# Altium PCB CAN Logger 3d HP3561 PCB.PcbDoc (part 2 of 3)
Units mil, origin at the board's own origin, x right, y up, seen from the top; angles counter-clockwise.
Board outline 2229 x 3254 mil, 4 copper layers (Component Side, Signal Layer 2, Signal Layer 1, Solder Side), stack 33.234 mil thick; 117 components, 131 nets, 581 pads, 372 vias.
Unrouted connection lines stored in the file: 2.
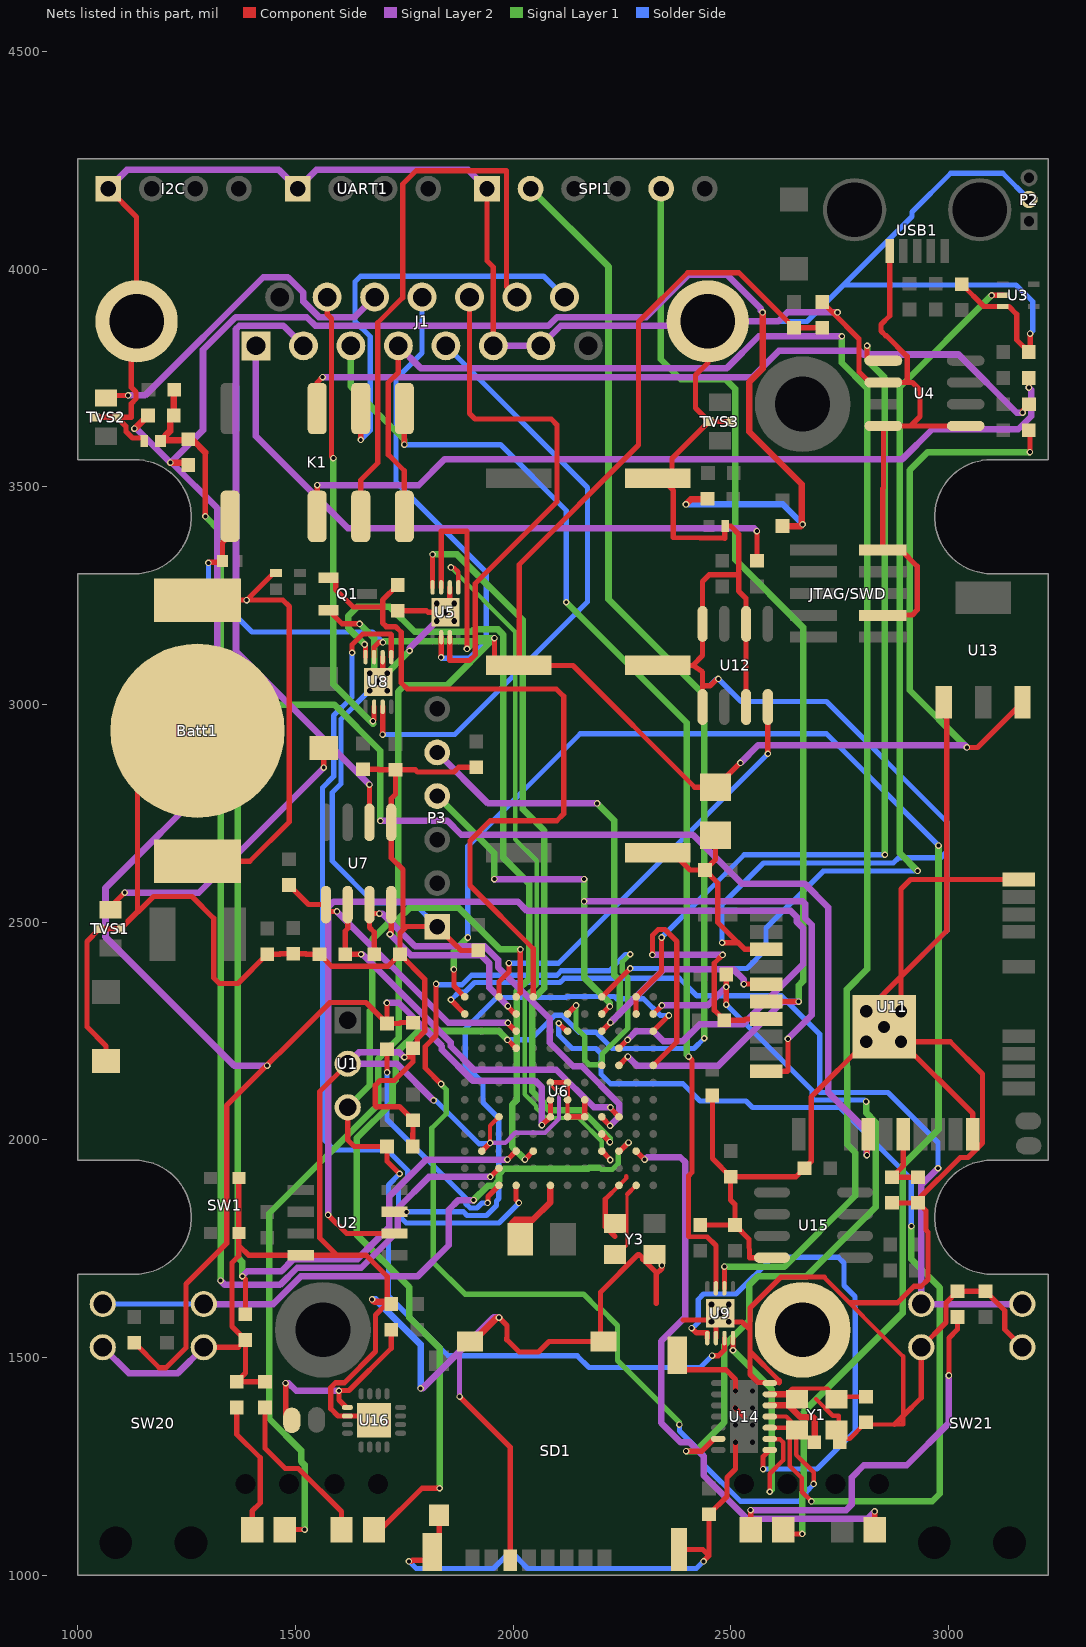
[diagram p4: the nets of this part, all layers, seen from the top]

## Via types
v1: diameter 15, hole 9, Component Side to Solder Side, 290 vias
v2: diameter 20, hole 10, Component Side to Solder Side, 66 vias
v3: diameter 20, hole 13, Component Side to Solder Side, 12 vias
v4: diameter 50, hole 28, Component Side to Solder Side, 4 vias

## Nets (pads, with @x,y where several pads share a name; then routed paths per layer and width w, separated by ;. In a path a pad name is that pad's centre, name@x,y a point inside that pad or via, vN(x,y) a via of type N, cw(c..) or ccw(c..) an arc to the next point about the centre after c; other vN are vias at no path point) (continued)
5V0: C2.1 C4.1 C6.2 C12.2 D11.2 K1.7 L6.2 R4.1 U1.3 U5.3 U8.3 U9.3 U13.3 | length 8118.3
  Component Side w12: v1(1300.18,3325.37) 1301.8,3326.99 1329.59,3326.99 D11.2@1332.6,3330 1332.6,3372 1350,3389.4 K1.7@1350,3432.36 ; U1.3@1620,2075 1620,2000 1635,1985 C4.1@1710.47,1985 1710.47,1951.24 v1(1739.36,1922.35) ; U8.3@1680.63,3109.17 1680.63,3131.63 1692,3143 v1(1701,3143) ; U5.3@1834.69,3269.17 1834.69,3398.27 1894,3398.27 v1(1894,3128) ; v1(1957,3152.5) 1957,3103 1970,3090 C2.1@2013.15,3090 C2.1@2014,3090 ; v1(2457,1504.5) 2471.82,1504.5 2485.32,1518 U9.3@2485.32,1545 ; v1(2521.92,2866) 2520.76,2866 C12.2@2465,2810.24 2417,2810.24 2137.24,3090 C2.1@2014,3090 ; C6.2@2710,3865.47 L6.2@2645,3865.47 2518.47,3992 2401,3992 2288,3879 2288,3596 2014,3322 C2.1@2014,3090 ; v1(3042.32,2901.5) 3066.5,2901.5 U13.3@3170,3005 ; R4.1@3184.53,3630 3187,3627.53 v1(3187,3580)
  Signal Layer 2 w15: v1(2521.92,2866) 2562.92,2907 3036.82,2907 v1(3042.32,2901.5)
  Signal Layer 1 w15: U1.3@1620,2075 1670.47,2125.47 1670.47,2296.2 1676,2301.73 1676,2460.28 1717.19,2501.47 1717.19,2540.19 1736,2559 1736,3030 1750,3044 1848,3044 1956.5,3152.5 v1(1957,3152.5) ; v1(1701,3143) 1703.77,3145.77 1950.27,3145.77 v1(1957,3152.5) ; v1(1894,3128) 1918.5,3152.5 v1(1957,3152.5) ; v1(3042.32,2901.5) 2911,3032.82 2911,3538.5 2952.5,3580 v1(3187,3580)
  Solder Side w12: v1(1300.18,3325.37) 1300.18,3266.8 1400.01,3166.97 1677.03,3166.97 v1(1701,3143) ; v1(1739.36,1922.35) 1713.5,1896.49 1713.5,1641.89 1850.89,1504.5 2147.02,1504.5 2174.14,1477.38 2429.88,1477.38 v1(2457,1504.5)
A6: J1.1 R18.1 | length 1517
  Component Side w12: R18.1@2560,3330.03 v1(2560,3398.27)
  Signal Layer 2 w15: J1.1@1409.21,3824.09 1409.21,3616.5 1620.72,3405 2553.27,3405 v1(2560,3398.27)
A6_Sense: U6.A3 U12.8 | length 988.2
  Component Side w12: U6.A3@1967.52,2328.7 1967.52,2363.52 1990.28,2386.28 v1(1990.28,2406) ; v1(2585,2887) U12.8@2585,2994.53
  Solder Side w12: v1(1990.28,2406) 2104,2406 v1(2585,2887)
A7: J1.11 TVS2.1 | length 798.2
  Component Side w12: TVS2.1@1065,3710 v1(1115.5,3710)
  Signal Layer 2 w15: v1(1115.5,3710) 1154.34,3710 1426.01,3981.67 1482.7,3981.67 1518.27,3946.1 1518.27,3925.71 1553.84,3890.14 1636.08,3890.14 J1.11@1681.85,3935.91
A7_Measured: C17.2 D9.2 R15.2 R24.1 U6.L3 | length 2959.6
  Component Side w12: R24.1@1220.45,3655 R24.1@1220.45,3663.93 ; v1(1293,3432.36) 1293,3579 ; v1(1947.52,1915) U6.L3@1967.52,1935
  Component Side w15: R24.1@1220.38,3664 1212.13,3655.75 1212.13,3628.07 1190.04,3605.98 D9.2@1190.04,3605 1192.31,3607.26 1251.24,3607.26 C17.2@1253.5,3609.53 1255.03,3608 1264,3608 1293,3579 ; R24.1@1220.45,3663.93 1220.95,3664.43 1220.95,3722.43 R15.2@1221.53,3723
  Signal Layer 2 w15: v1(1328,1677) 1338,1667 1464.47,1667 1503.97,1706.5 1651.07,1706.5 1735,1790.43 1735,1843.28 1806.72,1915 v1(1947.52,1915)
  Signal Layer 1 w15: v1(1293,3432.36) 1328,3397.36 v1(1328,1677)
AGND: C17.1 C21.1 C23.2 C24.1 L5.2 R24.2 R28.2 U6.G6 U6.H6 | length 6526.1
  Component Side w12: C21.1@1130,1534.47 1130,1534.29 1187.34,1476.96 1202.66,1476.96 1248.5,1522.79 1248.5,1669 1342,1762.5 1342,2079 1579,2316 1661.79,2316 C23.2@1710.24,2267.56 ; v1(1710,2315) 1710.24,2314.76 C23.2@1710.24,2267.56 ; L5.2@1770,2269.53 1741.21,2269.53 1739,2267.32 C23.2@1710.47,2267.32 C23.2@1710.24,2267.56 ; v1(2066,2034) 2066.52,2034 U6.H6@2085.63,2053.11 U6.G6@2085.63,2092.48
  Component Side w15: v1(1130,3634) 1131.32,3634 R24.2@1161.32,3664 ; v1(1212.9,3555.57) 1248.4,3555.57 C17.1@1253.5,3550.47 ; v1(2397,3460) 2408.15,3471.15 2445.02,3471.15 R28.2@2446.4,3472.53 ; v1(2573,3901) 2573,3771.24 2542.5,3740.74 2542.5,3626.5 2663,3506 v1@2663,3412 ; C24.1@2618.79,3410 2661,3410 v1@2663,3412 ; v1(2665,3414) v1@2663,3412
  Signal Layer 2 w15: v1(1130,3634) 1134.47,3634 v1(1212.9,3555.57) ; v1(1435,2170.87) 1359.13,2170.87 1063.71,2466.29 1063.71,2578.71 1320.18,2835.18 1320.18,3451.33 1215.94,3555.57 v1(1212.9,3555.57) ; v1(1710,2315) 1737.07,2315 1836.5,2215.57 1836.5,2206.93 1906.93,2136.5 2050,2136.5 2066,2120.5 v1(2066,2034) ; v1(2573,3901) 2569,3905 2569,3909.12 2491.13,3986.99 2402.5,3986.99 2305.65,3890.14 2101.3,3890.14 2081.03,3869.86 1545.83,3869.86 1525.83,3889.86 1362.48,3889.86 1287.69,3815.07 1287.69,3630.36 v1(1212.9,3555.57)
  Solder Side w15: v1(2397,3460) 2619,3460 v1(2665,3414)
AREF: C23.1 U6.M3 | length 539.8
  Component Side w12: v1(1710.47,2155) C23.1@1710.47,2208.27 ; v1(1941.39,1855.5) 1941.96,1856.07 1941.96,1870.07 U6.M3@1967.52,1895.63
  Solder Side w12: v1(1710.47,2155) 1710.47,2047.37 1890.5,1867.34 1890.5,1854.34 1901.34,1843.5 1916.66,1843.5 1928.66,1855.5 v1(1941.39,1855.5)
BTTN1: SW21.1 SW21.3 U6.B1 | length 2038.7
  Component Side w12: v1(1857,2322) 1857,2321.11 U6.B1@1888.78,2289.33
  Signal Layer 2 w15: v1(2975.84,1935) 2937.5,1896.66 SW21.1@2937.5,1623 SW21.3@3169.5,1623
  Solder Side w12: v1(1857,2322) 1857.81,2322 1875.31,2339.5 1889.3,2339.5 1911.25,2361.46 2107.54,2361.46 2117.58,2371.5 2381.5,2371.5 2422,2331 2616.36,2331 2704,2243.36 2704,2110 2705,2109 2861.16,2109 2975.84,1994.32 v1(2975.84,1935)
BTTN2: SW20.1 SW20.3 U6.K10 | length 1461.3
  Component Side w12: U6.K10@2242.3,1971.41 U6.K10@2243.11,1972.22 ; U6.K10@2243.11,1974.37 U6.K10@2243.11,1972.22 ; v1(2265,1994.11) U6.K10@2243.11,1972.22
  Signal Layer 2 w15: SW20.3@1289.5,1623 1448.76,1623 1512.26,1686.5 1780.5,1686.5 1852,1758 1852,1839.68 1874.32,1862 v1(1909,1862)
  Signal Layer 1 w12: 2203.74,1932.39 2227.55,1932.39 2241.5,1946.34 2241.5,1970.61 v1(2265,1994.11)
  Signal Layer 1 w15: v1(1909,1862) 1942,1895 1955.8,1895 1967.52,1906.72 1967.52,1921.8 1979.72,1934 2057.35,1934 2057.72,1933.63 2172.46,1933.63 2174.72,1935.89 2196.96,1935.89
  Solder Side w12: SW20.1@1057.5,1623 SW20.3@1289.5,1623
CAN0H: J1.13 U5.7 | length 1203
  Component Side w12: U5.7@1854.37,3155 1854.37,3102 1855.37,3101 1900,3101 1913,3114 1913,3278 2101,3466 2101,3642.5 2087.5,3656 1912.5,3656 1899.96,3668.54 J1.13@1899.96,3935.91
CAN0L: J1.12 U5.6 | length 1068
  Component Side w12: v1(1834.69,3108.5) U5.6@1834.69,3155
  Solder Side w12: J1.12@1790.91,3935.91 1790.91,3807.91 1731,3748 1731,3511 1938.5,3303.5 1938.5,3146.34 1898.66,3106.5 1836.69,3106.5 v1(1834.69,3108.5)
CAN0RX: U5.4 U6.J9 | length 1720.4
  Component Side w12: U5.4@1815,3269.17 v1(1815,3345) ; U6.J9@2203.74,2013.74 2222,1995.48 v1(2222,1995)
  Signal Layer 1 w15: v1(1815,3345) 1871.25,3345 2022,3194.25 2022,2760 2071.5,2710.5 2071.5,2348.97 2044,2321.47 2044,2111.97 2070,2085.97 2070,2080.43 2082.43,2068 2157.5,2068 2222,2003.5 v1(2222,1995)
CAN0TX: U5.1 U6.K9 | length 1664.7
  Component Side w10: v1(1857,3315) 1864,3315 1874.06,3304.94 U5.1@1874.06,3269.17
  Component Side w12: U6.K9@2203.74,1974.37 2223,1955.11 v1(2223,1954)
  Signal Layer 1 w10: v1(1857,3315) 2004.5,3167.5 2004.5,2690.77 2054,2641.27 2054,2356.22 2026.5,2328.72 2026.5,2104.72 2052.5,2078.72 2052.5,2073.18 2075.18,2050.5 2150.25,2050.5 2203.75,1997 2203.75,1974.36 2223,1955.11 v1(2223,1954)
CAN1H: J1.5 U8.7 | length 1384
  Component Side w12: v1(1700.31,2931) U8.7@1700.31,2995
  Solder Side w12: v1(1700.31,2931) 1866,2931 2171,3236 2171,3498.53 J1.5@1845.43,3824.09
CAN1L: J1.10 U8.6 | length 1064.3
  Component Side w12: J1.10@1572.8,3935.91 1572.8,3897 1583,3886.8 1583,3570 v1(1587,3566) ; v1@1677.78,2961.65 1680.61,2964.48 U8.6@1680.63,2995
  Signal Layer 1 w15: v1(1587,3566) 1587,3047.13 v1@1678,2956.13 ; v1(1678,2962) v1@1678,2956.13 ; v1@1678.37,2955.76 v1@1678,2956.13
CAN1RX: U6.K5 U8.4 | length 1791.7
  Component Side w12: v1(1658.94,3138) 1660.94,3136 U8.4@1660.94,3109.17 ; v1(2027,1955) 2027,1955.11 U6.K5@2046.26,1974.37
  Signal Layer 1 w15: v1(1658.94,3138) 1621,3175.94 1621,3203.09 1642.11,3224.19 1716.81,3224.19 1773.91,3167.09 1904.8,3167.09 1910.22,3172.5 1965.28,3172.5 1977,3160.78 1977,2648.5 2036.5,2589 2036.5,2369.89 2008,2341.39 2008,2091.28 1998,2081.28 1998,1984 v1(2027,1955)
CAN1TX: U6.M4 U8.1 | length 1997.9
  Component Side w12: v1(1630,3119) 1630,3137.5 1654.5,3162 1719,3162 1720,3161 U8.1@1720,3109.17 ; U6.M4@2006.89,1895.63 2006.89,1862.57 2013.15,1856.31 v1(2013.15,1855.5)
  Solder Side w12: v1(1630,3119) 1630,3016.97 1587.75,2974.72 1587.75,2834.85 1562,2809.1 1562,2004 1589,1977 1710.87,1977 1757.86,1930.02 1757.86,1914.69 1736.5,1893.33 1736.5,1827.34 1754.34,1809.5 1967.15,1809.5 v1(2013.15,1855.5)
CAN2H: J1.3 K1.3 U9.7 | length 2755.5
  Component Side w12: v1(1750,3597) K1.3@1750,3680 ; v1(2403,2191.5) 2411.1,2183.4 2411.1,1925.67 2403,1917.57 2403,1778 2446,1777 2465.63,1757.37 U9.7@2465.63,1659.17
  Signal Layer 1 w15: J1.3@1627.32,3824.09 1627.32,3730.68 1750,3608 v1(1750,3597) ; v1(2122,3235) 2399,2958 2399,2195.5 v1(2403,2191.5)
  Solder Side w12: v1(1750,3597) 1971,3597 2122,3446 v1(2122,3235)
CAN2H/J1708+: J1.15 K1.1 | length 965
  Component Side w12: v1(1650,3608) K1.1@1650,3680
  Solder Side w12: v1(1650,3608) 1672,3630 1672,3845 1637,3880 1637,3971 1650,3984 2069.98,3984 J1.15@2118.07,3935.91
CAN2L: J1.4 K1.6 U9.6 | length 3930.1
  Component Side w12: J1.4@1736.38,3824.09 1736.38,3763 1713,3739.62 1713,3574 1750,3537 K1.6@1750,3432.36 ; U9.6@2485.32,1659.17 v1(2485.32,1709)
  Signal Layer 2 w15: J1.4@1736.38,3824.09 1787.47,3773 2491.12,3773 2564.12,3846 v1(2755,3846)
  Signal Layer 1 w15: v1(2485.32,1709) 2623,1709 2786,1872 2786,1971 2767,1990 2767,2167.57 2766.57,2168 2766.57,2345.57 2813,2392 2813,3727.21 2755,3785.21 v1(2755,3846)
CAN2L/J1708-: J1.14 K1.4 | length 1353.7
  Component Side w12: K1.4@1650,3432.36 1650,3516 1689,3555 1689,3877 1746.64,3934.64 1746.64,4195.64 1777,4226 1984,4226 1985,4225 1985,3959.92 J1.14@2009.02,3935.91
CAN2RX: U9.4 U14.2 | length 552
  Component Side w10: v1(2589.37,1192) 2589.37,1233.5 2620,1264.13 2620,1305.63 2612.85,1312.78 2590.09,1312.78 U14.2@2589.37,1313.5
  Component Side w12: v1(2505,1517) U9.4@2505,1545
  Signal Layer 1 w15: v1(2505,1517) 2594.05,1427.94 2594.05,1196.68 v1(2589.37,1192)
CAN2TX: U9.1 U14.1 | length 1200.9
  Component Side w12: v1(2410,1568) 2421,1557 2445.94,1557 U9.1@2445.94,1545 ; v1(2574.05,1244.06) 2574,1244.11 2574,1272.54 U14.1@2589.37,1287.91
  Solder Side w12: v1(2410,1568) 2412.5,1568 2425,1580.5 2425,1633.5 2437.5,1646 2512,1646 2596.5,1730.5 2746.66,1730.5 2760,1717.16 2760,1666 2785.35,1640.65 2785.35,1614.77 2786,1614.12 2786,1332 2698.05,1244.06 v1(2574.05,1244.06)
"CAN 1 Switch": Q1.1 R14.2 U6.A5 | length 1749
  Component Side w12: Q1.1@1575.71,3291.5 1586.53,3291.5 1592.35,3285.69 1592.35,3264.42 1632.77,3224 1700.31,3224 ; R14.2@1735,3274.53 1700.31,3239.84 1700.31,3224 ; U6.A5@2046.26,2328.7 2046.26,2439.32 1901,2584.58 1901,2687 1947,2733 2100,2733 2116,2749 2116,3019 2099,3036 1757,3036 1743,3050 1743,3166 1730,3179 1708.81,3179 1700.31,3187.5 1700.31,3224
CHIP_EN: R17.1 U6.K4 U11.22 | length 4484.5
  Component Side w12: v1(1378,1687) 1385,1680 R17.1@1385,1599.53 ; v1(1987,1955) 1987.52,1955 U6.K4@2006.89,1974.37 ; v1(2812.57,1965) 2812.57,2009.64 U11.22@2815.84,2012.91
  Signal Layer 2 w15: v1(1378,1687) 1389.53,1698.53 1467.72,1698.53 1495.69,1726.5 1642.78,1726.5 1715,1798.72 1715,1869.71 1800.29,1955 v1(1987,1955) ; v1(1695,2733) 1849,2733 1881,2701 2413,2701 2525,2589 2669,2589 2724,2534 2724,2109.1 2812.57,2020.53 v1(2812.57,1965)
  Signal Layer 1 w15: v1(1378,1687) 1378,1720 1368,1730 1368,2981.5 1386.5,3000 1589,3000 1695,2894 v1(1695,2733)
CLKO/SOF: U6.C7 U14.3 | length 2314.8
  Component Side w10: U14.3@2589.37,1339.1 2629.14,1339.1 2635,1333.24 2635,1251.67 2663,1223.67 2663,1192 v1(2685,1170)
  Component Side w12: v1@2104.77,2268 U6.C7@2123.91,2248.87 ; U6.C7@2123.91,2249.41 U6.C7@2123.91,2248.87 ; U6.C7@2125,2249.96 U6.C7@2123.91,2248.87
  Signal Layer 1 w15: v1(2685,1170) 2962.5,1170 2980,1187.5 2980,1661 2914.5,1726.5 v1(2914.5,1802)
  Solder Side w12: v1(2104.72,2268) 2104.72,2241.1 2135.83,2209.99 2190.17,2209.99 2202,2198.16 2202,2151 2224,2129 2390,2129 2429.5,2089.5 2534.5,2089.5 2549.5,2074.5 2750.45,2074.5 2914.5,1910.45 v1(2914.5,1802)
CS1: R33.1 U6.E12 U11.16 | length 850.9
  Component Side w12: v1(2320,2425) 2320,2470.16 2333.34,2483.5 2348.66,2483.5 2376.03,2456.13 2376.03,2225.4 U6.E12@2321.85,2171.22 ; v1(2481,2425) 2462,2406 2462,2298.15 R33.1@2485.15,2275 2531,2275 2533.79,2277.79 U11.16@2581.04,2277.79
  Signal Layer 2 w15: v1(2320,2425) v1(2481,2425)
CS-CAN: R32.1 U6.B12 U14.13 | length 1843.6
  Component Side w12: U6.B12@2321.85,2289.33 v1(2341.52,2309) ; v1(2397.44,1285.25) 2433.45,1285.25 2461.71,1313.5 U14.13@2471.26,1313.5 ; v1(2489.53,2311) v1(2489.53,2351.75) R32.1@2489.53,2380
  Signal Layer 2 w15: v1(2341.52,2309) 2446.77,2309 v1(2489.53,2351.75)
  Signal Layer 1 w15: v1(2397.44,1285.25) 2419.1,1285.25 2485,1351.15 2485,1528 2542,1585 2542,1666.5 2562.5,1687 2674,1687 2832.57,1845.57 2832.57,2040.7 2810.5,2062.77 v1(2810.5,2088.16)
  Solder Side w12: v1(2489.53,2311) 2687,2113.53 2687,2093 2688,2092 2806.66,2092 v1(2810.5,2088.16)
"Debug RX": P3.4 U6.B9 U11.19 | length 1766.7
  Component Side w12: U6.B9@2203.74,2289.33 2221.41,2307 v1(2222.23,2307) ; U11.19@2581.04,2157.79 2630,2157.79 2631,2158.79 v1(2631,2232)
  Signal Layer 2 w15: v1(1957,2599) v1(2163,2599) ; v1(2163,2548) 2665,2548 2671,2542 2671,2509.24 2685.82,2494.42 2685.82,2286.82 v1(2631,2232)
  Signal Layer 1 w15: P3.4@1825.47,2790 1957,2658.47 v1(1957,2599) ; v1(2163,2599) v1(2163,2548) 2163,2373 2222.23,2313.77 v1(2222.23,2307)
"Debug TX": P3.5 U6.C9 U11.14 | length 1405.7
  Component Side w12: U6.C9@2203.74,2249.96 v1(2223.43,2269.65) ; v1(2530,2358) 2580.83,2358 U11.14@2581.04,2357.79
  Signal Layer 2 w15: P3.5@1825.47,2890 1942.47,2773 v1(2193,2773) ; v1(2223.43,2269.65) 2345.53,2391.75 2506.09,2391.75 2530,2367.85 v1(2530,2358)
  Signal Layer 1 w15: v1(2193,2773) 2232.04,2733.96 2232.04,2378.67 2245,2365.71 2245,2291.22 v1(2223.43,2269.65)
EOSC16: U6.M11 Y3.1 | length 172.3
  Component Side w7: Y3.1@2242.3,1740 2261.93,1759.62 2261.93,1875.08 2262,1875.15
  Component Side w10: 2262,1875.15 U6.M11@2282.48,1895.63
EXTAL32: U6.M6 X1.2 | length 223.6
  Component Side w15: X1.2@2016.07,1762.76 2004.33,1762.76 1996.56,1754.98 1996.56,1807.9 2005.34,1816.68 2045.21,1816.68 2085.63,1857.1 U6.M6@2085.63,1895.63
GND: Batt1.2 C1.1 C2.2 C3.2 C4.2 C5.1 C6.1 C7.1 C8.1 C9.1 C10.2 C11.1 C12.1 C13.1 C14.1 C15.1 C16.1 C18.1 C19.1 C20.1 C22.1 C25.1 C28.2 D9.1 D10.1 I2C.1 J1.6 J1.7 J1.16 J1.17 JTAG/SWD.3 JTAG/SWD.9 L5.1 P2.2 P3.1 pad.0@2665,1564 Q1.2 R2.2 R3.2 R7.2 R8.2 R9.2 R11.2 R12.2 R13.2 R14.1 R17.2 R19.2 R23.2 R27.2 SD1.6 SD1.P1 SD1.P2 SD1.P3 SD1.P4 SD1.P5 SD1.SW SPI1.1 SW1.3 SW1.4 SW20.2 SW20.4 SW21.2 SW21.4 TVS1.3 TVS2.3 TVS3.3 U1.2 U2.8 U3.3 U4.2 U4.4 U4.5 U5.0 U5.2 U6.F6 U6.F7 U6.G7 U6.G8 U6.H3 U6.H7 U6.H8 U6.K2 U6.M10 U7.5 U8.0 U8.2 U9.0 U9.2 U11.9 U11.12 U11.28 U11.29 U12.2 U12.4 U12.5 U12.7 U13.1 U14.7 U15.4 U16.2 U16.17 UART1.1 USB1.4 Y1.2 Y1.4 Y3.2 Y3.4 Z1.1 | length 28504
  Component Side w8: U6.F6@2085.63,2131.85 2080.69,2131.85 2100.54,2112 v1(2105.29,2112)
  Component Side w10: v1(1947.01,1993.23) 1947.01,2032.6 U6.H3@1967.52,2053.11 ; U6.H7@2125,2053.11 U6.G7@2125,2092.48 ; 2210.5,1863.02 2211.5,1864.02 U6.M10@2243.11,1895.63 2260.12,1912.64 2260.12,1916.99 ; SD1.P3@2370.65,1490.79 SD1.P3@2370.65,1516.58 ; 2545,1514.29 2545,1613.71 2615.29,1684 2714.71,1684 2895.75,1502.96 2895.75,1366.22 2895.75,1346.33 2875.86,1346.33 2805.51,1346.33 2773.03,1313.85 2748.06,1313.85 2748.06,1366.78 2733.85,1366.78 2695.47,1405.17 ; 2611.1,1441.46 2611.1,1443 ; 2611.1,1446.78 2611.1,1448.19
  Component Side w12: TVS2.3@1040,3660 TVS2.3@1090,3660 ; Z1.1@1065,2181 1065,2216 1021,2260 1021,2456 TVS1.3@1050,2485 TVS1.3@1100,2485 1174,2559 1262.5,2559 1312.5,2509 1312.5,2372.1 1325,2359.6 1368.2,2359.6 C10.2@1435,2426.4 1464,2426.4 1465.15,2427.55 C1.1@1495,2427.55 1524,2427.55 1524.94,2426.61 R9.2@1555.47,2426.61 1583.08,2399 1712.61,2399 R8.2@1740,2426.39 ; I2C.1@1070,4185 1135,4120 J1.16@1135,3880 1123,3868 1123,3728.5 1123.16,3728.5 1134,3717.66 1134,3702.34 1123.16,3691.5 1123,3691.5 1123,3660 TVS2.3@1090,3660 ; 1116,2504 1137,2525 1137,2802 Batt1.2@1275,2940 ; D9.1@1152.64,3605 1152.64,3609.2 1149.78,3612.05 1125.78,3612.05 1110.97,3626.87 1110.97,3639.03 TVS2.3@1090,3660 ; SW20.4@1289.5,1524 1368.53,1524 R17.2@1385,1540.47 ; SW1.4@1369.96,1900 SW1.3@1369.96,1786.65 1369.96,1757.99 ; R3.2@1430,1444.53 R2.2@1365,1444.53 1385,1464.53 R17.2@1385,1540.47 ; Q1.2@1575.71,3216.69 1606.93,3185.47 v1(1647.5,3185.47) ; U1.2@1620,2175 1556,2111 1556,1775 1596,1735 ; C16.1@1655,2851.62 1691,2851.62 1692.15,2850.47 R12.2@1730,2850.47 ; U16.17@1680.47,1356.02 1654.84,1356.02 1645,1365.87 U16.2@1619.45,1365.87 1598,1365.87 1581.34,1382.53 1581.34,1431.66 1592.17,1442.5 1612.62,1442.5 1684,1513.88 1684,1598 C25.1@1711,1625 ; U8.2@1700.31,3109.17 1700.31,3082.24 v3(1710.47,3072.09) ; C25.1@1711,1617.03 C25.1@1711,1625 ; R14.1@1735,3215.47 1801.14,3215.47 1804.52,3212.09 U5.0@1844.53,3212.09 ; v1(1750,2190) 1750.57,2190.57 1766.07,2190.57 1770,2194.5 ; v1(1760.66,1032) 1761.24,1032.57 1766.72,1032.57 1768.95,1034.8 1797.56,1034.8 1814.2,1051.44 SD1.P2@1814.2,1053.7 1830.15,1069.65 SD1.SW@1830.15,1138.35 ; C4.2@1769.53,1985 1769.53,2015 1770,2015.47 C20.1@1770,2045.47 1739,2076.47 1685,2076.47 1683.53,2077.95 1683.53,2125.53 1694.5,2136.5 1727,2136.5 1770,2179.5 1770,2194.5 ; U5.2@1854.37,3269.17 1854.37,3242.24 v3(1864.53,3232.09) ; v1(1877,1410.71) 1993.14,1294.57 SD1.6@1993.14,1034.8 ; R11.2@1915,2855.95 1874.95,2855.95 1864,2845 1780.47,2845 1775,2850.47 R12.2@1730,2850.47 ; C13.1@1920,2435.47 1880,2435.47 P3.1@1825.47,2490 1755,2490 1747,2482 ; U6.K2@1928.15,1974.37 v1(1947.01,1993.23) ; SPI1.1@1940,4185 1940,4019.49 1954.49,4005 J1.6@1954.49,3824.09 ; v1(1967.52,1592.06) 1986.02,1573.56 1986.02,1545.79 1985.57,1545.34 1985.57,1541.15 2013.86,1512.86 2058.01,1512.86 2082.12,1536.97 SD1.P4@2207.31,1536.97 2200.44,1543.84 2200.44,1650.28 2287.16,1737 2289.13,1737 2297.89,1728.24 2297.89,1726.27 2328.85,1695.31 2328.85,1692.19 ; U6.F6@2085.63,2131.85 U6.F7@2125,2131.85 U6.G7@2125,2092.48 ; U6.H7@2125,2053.11 U6.H8@2164.37,2053.11 U6.G8@2164.37,2092.48 ; 2211.5,1864.02 2211.5,1800.85 2234.01,1778.34 ; 2328.85,1624.66 2328.85,1692.19 ; C28.2@2332.05,2660 2366,2660 2406,2620 R27.2@2440.47,2620 ; C2.2@2332.05,3090 2412.5,3090 ; C3.2@2332.05,3520 C3.2@2340,3520 ; v1(2341.52,1712) 2341.52,1704.86 2328.85,1692.19 ; 2368,3489.07 2368,3383.94 2485.93,3382 D10.1@2486.93,3410 2500,3410 2518,3392 2518,3298 ; 2368,3492 2365,3495 ; SD1.P3@2370.65,1516.58 SD1.P3@2375.6,1521.53 ; SD1.P3@2375,1472.46 2488.17,1472.46 2510.63,1450 2510.63,1423.74 ; SD1.P1@2380.74,1059.61 2435.59,1059.61 2450,1045.2 ; SD1.P3@2386,1531.92 SD1.P3@2375.89,1521.82 ; 2390.28,1586.68 2450.88,1586.68 v3(2455.47,1582.09) 2465.63,1571.93 U9.2@2465.63,1545 ; C3.2@2396,3520 C3.2@2365,3520 ; R13.2@2430,1804.53 2465.62,1804.53 C9.1@2509.37,1804.53 ; U12.5@2435,2994.53 2435,3042 ; v1(2437.5,1032) 2437.5,1032.7 2450,1045.2 ; J1.17@2446.81,3880 2446.81,3784.81 2419,3757 2419,3681 TVS3.3@2450,3650 ; 2452,3044 2435,3043 ; C7.1@2457.6,2102.32 2457.6,1957.4 C22.1@2499.52,1915.47 ; C12.1@2465,2700 2465,2644.53 R27.2@2440.47,2620 ; v1(2471.56,3059) 2468.11,3059 2452.06,3042.95 2435,3042 ; v1(2480,2453) 2516.79,2453 ; v3(2495.47,1582.09) 2525.91,1582.09 2544,1564 ; TVS3.3@2500,3650 TVS3.3@2450,3650 ; 2510.63,1305.63 2510.63,1244 2491,1224.37 2491,1181.47 C8.1@2450,1140.47 2450,1045.2 ; 2510.63,1384.37 2510,1384.37 2529.68,1364.69 2530.31,1364.69 ; U12.7@2535,2994.53 U12.2@2535,3185.47 2535,3244 2518,3261 2518,3298 ; U15.4@2594.45,1729.53 2543,1729.53 2542,1771.89 C9.1@2509.37,1804.53 ; 2611.1,1443 2562.5,1443 2544,1461.5 2544,1513.88 ; 2611.1,1446.78 2544,1513.88 ; C6.1@2710,3924.53 2733.53,3901 ; 2715.12,1685 2614.88,1685 2544,1614.12 2544,1564 ; v1(2745,3901) 2733.53,3901 ; 2774.12,1626 2882.52,1626 2920.52,1664 2937.5,1664 2953,1679.5 2953,1788 2948,1793 2948,1837.47 C11.1@2930,1855.47 ; v4(2811,2295.47) 2891,2375.47 ; JTAG/SWD.3@2849.06,3205 2850.06,3206 2917,3206 2927.99,3216.99 2927.99,3317.6 2890.59,3355 JTAG/SWD.9@2849.06,3355 2849.06,3496 2850.51,3497.46 U4.4@2850.51,3640 2912.5,3640 ; USB1.4@2865,4042 2865,3893.13 2845,3873.13 2845,3857.81 2855.84,3846.97 2857.87,3846.97 2905,3799.84 2905,3741 2904,3740 ; C5.1@2870,1855.47 C11.1@2930,1855.47 ; 2875.86,1346.33 2895.75,1366.22 2937.5,1407.97 SW21.2@2937.5,1524 2994,1580.5 2994,1625.69 R19.2@3020.84,1652.53 R23.2@3085,1652.53 3129,1608.53 3129,1564.5 SW21.4@3169.5,1524 ; v4(2891,2295.47) 2891,2375.47 ; U13.1@2988.9,3005 2988.9,2986 2996,2986 2996,2598.03 ; C19.1@3030.55,3965.43 3081.57,3914.41 U3.3@3124.57,3914.41 3138.59,3914.41 3156.5,3896.5 3156.5,3838.03 R7.2@3184.53,3810 3187.5,3812.97 v1(3187.5,3851.94) ; U4.5@3039.49,3640 2912.5,3640 ; U11.28@3055.84,2012.91 3055.84,2060.63 v4(2891,2225.47) ; U11.9@3160.96,2598.03 2996,2598.03 ; 1369.96,1757.99 1369.96,1733.96 1354,1718 1354,1571.47 R17.2@1385,1540.47 ; 1369.96,1757.99 1392.95,1735 U2.8@1512.13,1735 1596,1735 ; 1596,1735 1662.5,1735 1711,1686.5 1711,1627.96 C25.1@1711,1625 ; R12.2@1730,2850.47 1730,2794 1720,2784 U7.5@1720,2729.49 1720,2648 1747,2621 1747,2482 ; R8.2@1740,2426.39 1796.75,2369.64 1796.75,2249.22 1779.75,2232.22 1779.75,2220.22 L5.1@1770,2210.47 1770,2194.5 ; R8.2@1740,2426.39 1740,2475 1747,2482 ; C3.2@2340,3520 C3.2@2365,3520 ; C3.2@2340,3520 2365,3495 ; 2365,3495 C3.2@2365,3520 ; C3.2@2365,3520 2365,3565 TVS3.3@2450,3650 ; SD1.P3@2375.6,1521.53 SD1.P3@2375.89,1521.82 ; SD1.P3@2375.6,1521.53 2375.6,1515.97 SD1.P3@2375.89,1521.82 ; 2412.5,3090 2435,3075 2435,3043 ; 2412.5,3090 2435,3112.5 U12.4@2435,3185.47 2435,3283 2450,3298 2518,3298 ; 2435,3042 2435,3043 ; R27.2@2440.47,2620 2470,2590.47 2470,2499.79 2516.79,2453 ; C22.1@2499.52,1915.47 2499.52,1862 2509.37,1852.16 C9.1@2509.37,1804.53 ; C22.1@2499.52,1915.47 2649.67,1915.47 C18.1@2669.19,1935 2684.5,1950.31 2684.5,2098.97 v4(2811,2225.47) v4(2891,2225.47) ; 2516.79,2453 2532,2437.79 U11.12@2581.04,2437.79 2532,2438.79 2517.79,2453 2516.79,2453 ; 2544,1513.88 2544,1564 ; 2733.53,3901 2794.5,3840.03 2794.5,3764.52 2819.02,3740 U4.2@2850.51,3740 2904,3740 ; v4(2891,2225.47) 3004.03,2225.47 3078,2151.5 3078,1993 3045,1960 3027,1960 2930,1863 C11.1@2930,1855.47 ; 2891,2375.47 2891,2576.53 2912.5,2598.03 2996,2598.03 ; 2891,2375.47 2996,2480.47 2996,2598.03 ; 2904,3740 2917,3740 2934.5,3722.5 2934.5,3662 2912.5,3640
  Component Side w15: v1(1675.92,1633.8) 1681.75,1627.96 1711,1627.96 1715.09,1627.96 C25.1@1720,1623.05 ; SD1.P5@1901.01,1536.97 1907.9,1536.97 1962.99,1592.06 v1(1967.52,1592.06)
  Signal Layer 2 w10: v1(1947.01,1993.23) 1981.73,1993.23 2005,2016.5 2073.25,2016.5 2105.29,2048.55 v1(2105.29,2112)
  Signal Layer 2 w12: v1(1877,1410.71) 1877,1514.28
  Signal Layer 2 w15: SW20.2@1057.5,1524 1116.97,1464.53 1230.03,1464.53 SW20.4@1289.5,1524 ; I2C.1@1070,4185 1113,4228 1462,4228 UART1.1@1505,4185 1548,4228 1897,4228 SPI1.1@1940,4185 ; v3(1670.47,3032.09) v3(1710.47,3032.09) ; v3(1670.47,3072.09) U8.0@1690.47,3072.09 ; U8.0@1690.47,3052.09 U8.0@1690.47,3072.09 ; v3(1710.47,3072.09) U8.0@1690.47,3072.09 ; v1(1750,2190) 1749.5,2190 1738.5,2201 1646,2201 U1.2@1620,2175 1733.24,2175 v1(1817.31,2090.93) ; v1(1762,3123.61) 1762,3129.56 v3(1824.53,3192.09) v3(1864.53,3192.09) ; v1(1787.45,1429.28) 1792,1429.28 1877,1514.28 1954.94,1592.22 1967.36,1592.22 v1(1967.52,1592.06) ; v3(1824.53,3232.09) 1825.44,3233 1863.61,3233 v3(1864.53,3232.09) 1864.53,3222 1854.44,3222 U5.0@1844.53,3212.09 ; J1.6@1954.49,3824.09 J1.7@2063.54,3824.09 2109.59,3870.14 2436.95,3870.14 J1.17@2446.81,3880 2608.98,3880 2629.98,3901 v1(2745,3901) ; v3(2455.47,1582.09) v3(2495.47,1582.09) ; v3(2455.47,1622.09) U9.0@2475.47,1622.09 ; U9.0@2475.47,1602.09 U9.0@2475.47,1622.09 ; v3(2495.47,1622.09) U9.0@2475.47,1622.09
  Signal Layer 1 w15: v1(1647.5,3185.47) 1681,3151.97 1681,3082.61 v3(1670.47,3072.09) ; v3(1710.47,3032.09) v3(1710.47,3072.09) v1(1762,3123.61) ; v3(1864.53,3192.09) v3(1864.53,3232.09) ; v3(2495.47,1582.09) v3(2495.47,1622.09)
  Solder Side w12: v3(1670.47,3032.09) 1604.75,2966.36 1604.75,2817.99 1584.5,2797.74 1584.5,2640.5 1680,2545 1770.47,2545 P3.1@1825.47,2490 ; v1(1760.66,1032) 1761.47,1032 1777.47,1016 1955,1016 1991.89,1052.89 1997,1052.89 2013.15,1036.74 2013.15,1035.85 2033,1016 2420.69,1016 2436.69,1032 v1(2437.5,1032) ; v1(1817.31,2090.93) 1822.43,2090.93 1921.92,1991.45 v1@1945.23,1991.45 ; J1.17@2446.81,3880 2675,3880 2759,3964 ; 2452,3044 2467,3059 v1(2471.56,3059) 2523.56,3007 2720,3007 2996,2731 2996,2662.5 ; v1(2480,2453) 2480,2541 2575,2636 2873,2636 2885,2648 2981.5,2648 2996,2662.5 ; v4(2811,2295.47) 2996,2480.47 2996,2662.5 ; P2.2@3185,4160 3124.68,4220.32 3004.94,4220.32 2916,4131.39 2916,4121 2759,3964 ; v1(3187.5,3851.94) 3193.5,3857.94 3193.5,3925.66 3155.16,3964 2759,3964
  Solder Side w15: v1(1675.92,1633.8) 1684.01,1633.8 1787.45,1530.36 v1(1787.45,1429.28)
INT-CAN: U6.B7 U14.4 | length 3065.4
  Component Side w10: U14.4@2589.37,1364.69 2627.35,1364.69 2650,1342.04 2650,1276.91 2690.29,1236.62 v1(2690.29,1210)
  Component Side w12: v1(1823,2358.5) 1823,2239.95 1798,2214.95 1798,2165.19 v1(1834.69,2128.5) ; U6.B7@2125,2289.33 v1(2144.69,2309.02)
  Signal Layer 1 w12: v1(1834.69,2128.5) 1834.69,2127.69 1846.5,2115.87 1846.5,2060.22 1813,2026.72 1813,1955.48 1816.5,1951.98 1816.5,1718.56 1889.22,1645.84 2161.33,1645.84 2193.8,1613.36 2200.35,1613.36 2239.78,1573.94 2239.78,1493.66 2382,1351.44 v1(2382,1346) ; v1(2144.69,2309.02) 2144.69,2257.08 2164.5,2237.26 2164.5,2183.34 2175.34,2172.5 2195.97,2172.5 2204.5,2181.03 2204.5,2197.66 2263.5,2256.66 2263.5,2373.38 2250.54,2386.34 2250.54,2408.11 v1(2269.04,2426.61)
  Solder Side w12: v1(1823,2358.5) 1825,2356.5 1882.25,2356.5 1904.21,2378.46 2100.5,2378.46 2110.54,2388.5 2220.79,2388.5 2258.33,2426.04 2268.47,2426.04 v1(2269.04,2426.61) ; v1(2382,1346) 2382,1331.84 2437.5,1276.34 2437.5,1254.42 2521.92,1170 2656,1170 2672.75,1186.75 2672.75,1191.64 2690.29,1209.19 v1(2690.29,1210)
"J1708 RX": U4.1 U6.A11 U6.B11 | length 2045.2
  Component Side w12: U6.B11@2282.48,2289.33 U6.A11@2282.48,2328.7 2341,2387.22 v1(2341,2465) ; v1(2813,3824.09) 2813,3797 2820,3790 U4.1@2850.51,3790
  Signal Layer 1 w15: v1(2813,3824.09) 2813,3791 2854,3750 v1(2854,2655)
  Solder Side w12: v1(2341,2465) 2531,2655 v1(2854,2655)
"J1708 TX": U3.2 U6.A9 | length 2325.5
  Component Side w12: U6.A9@2203.74,2328.7 v1(2269.04,2394) ; v1(3099,3940) U3.2@3124.57,3940
  Signal Layer 1 w15: v1(2929,2618) 2888,2659 2888,3729 v1(3099,3940)
  Solder Side w12: v1(2269.04,2394) 2537,2394 2581,2438 2581,2486.5 2712.5,2618 v1(2929,2618)
J1708+: K1.2 R5.2 | length 1794.3
  Component Side w12: K1.2@1550,3680 1550,3739.5 v1(1562.5,3752) ; v1(3170,3670.5) 3170,3675 R5.2@3185,3690
  Signal Layer 2 w15: v1(1562.5,3752) 2550,3752 2610.5,3812.5 2796.31,3812.5 2804.72,3804.09 3022.91,3804.09 3156.5,3670.5 v1(3170,3670.5)
J1708-: K1.5 R6.2 | length 1867.3
  Component Side w12: K1.5@1550,3432.36 v1(1550,3504) ; v1(3184.46,3728.25) v1(3184.46,3728.25) R6.2@3184.53,3750
  Signal Layer 2 w15: v1(1550,3504) 1783,3504 1843,3564 2894,3564 2962.5,3632.5 3160.28,3632.5 3190,3662.22 3190,3722.71 v1(3184.46,3728.25)
LED1: D1.1 U6.A4 | length 2047.4
  Component Side w12: D1.1@1475.4,1105 v1(1521,1105) ; U6.A4@2006.89,2328.7 2016.5,2338.31 v1(2016.5,2437.5)
  Signal Layer 1 w15: v1(1521,1105) 1521,1253.72 1513,1261.72 1513,1286.72 1440,1359.72 1440,1831.75 1690.47,2082.22 1690.47,2187.04 1737.5,2234.07 1737.5,2508.5 1762,2533 1875,2533 1970.5,2437.5 v1(2016.5,2437.5)
LED2: D2.1 SPI1.2 U6.D4 | length 4253
  Component Side w12: D2.1@1680.4,1105 1695.5,1105 1790.5,1200 v1(1831,1200) ; v1(1987,2230) 1987.48,2230 U6.D4@2006.89,2210.59
  Signal Layer 1 w15: v1(1831,1200) 1831,1522.27 1761.21,1592.06 1761.21,1662.08 1640.5,1782.78 1640.5,2003.97 1723.31,2086.78 1723.31,2129.87 1730.47,2137.03 1730.47,2163.28 1730,2163.76 1730,2198.28 1781.99,2250.28 1966.72,2250.28 v1(1987,2230) ; SPI1.2@2040,4185 2219,4006 2219,3242 2439,3022 v1(2439,2233.56)
  Solder Side w12: v1(1987,2230) 2039.84,2230 2096.34,2286.5 2112.39,2286.5 2151.56,2247.33 2190.17,2247.33 2227.5,2210 2415.44,2210 v1(2439,2233.56)
LED3: D4.1 U6.A1 | length 3422.5
  Component Side w12: v1(1864,2392) 1864,2353.48 U6.A1@1888.78,2328.7 ; D4.1@2620.4,1105 2630.4,1095 v1(2664,1095)
  Signal Layer 1 w15: v1(1864,2392) 1864,2433 v1(1896,2465) ; v1(2664,1095) 2664,1191 2667,1194 2667,1375 2894.5,1602.5 2894.5,1941.5 2977,2024 v1(2977,2676)
  Solder Side w12: v1(1896,2465) 1896,2675 2154,2933 2720,2933 v1(2977,2676)
LED4: D6.1 U6.K11 | length 1406.2
  Component Side w12: U6.K11@2282.48,1974.37 v1(2302,1954.85) ; D6.1@2830.4,1105 v1(2830.4,1147)
  Signal Layer 2 w15: v1(2302,1954.85) 2307.52,1960.37 2383.88,1960.37 2395.6,1948.65 2395.6,1593.78 2340,1538.18 2340,1350 2384.75,1305.25 2405.72,1305.25 2437.5,1273.47 2437.5,1229.81 2537.31,1130 2813.4,1130 v1(2830.4,1147)
LIN: J1.2 U7.6 | length 1436.8
  Component Side w12: U7.6@1670,2729.49 v1(1670,2816)
  Signal Layer 2 w15: J1.2@1518.27,3824.09 1472.5,3869.86 1370.77,3869.86 1363.44,3862.54 1363.44,3122.56 v1(1670,2816)
"LIN1 RX": R10.1 U6.C4 U7.1 | length 670.9
  Component Side w12: R10.1@1485,2585.47 1529.96,2540.51 U7.1@1570,2540.51 1570,2525 v1(1595,2525) ; v1(1988,2269) 1988,2267.3 2005.34,2249.96 U6.C4@2006.89,2249.96
  Signal Layer 2 w15: v1(1595,2525) 1851,2269 v1(1988,2269)
"LIN1 TX": U6.B4 U7.4 | length 469.7
  Component Side w12: v1(1717.19,2472.5) 1720,2475.31 U7.4@1720,2540.51 ; U6.B4@2006.89,2289.33 2004.56,2289.33 v1@1987.89,2306 ; v1@1987.89,2306 v1@1988,2306.11 ; v1@1987.89,2306 v1@1988,2306.11 ; v1@1988,2306.11 v1(1988,2307.34) v1@1988,2306.11
  Signal Layer 2 w15: v1(1717.19,2472.5) 1764.93,2424.77 1926.23,2424.77 1945.5,2405.5 1945.5,2349.84 v1(1988,2307.34)
"LIN !WAKE": R8.1 U6.H9 U7.3 | length 1002.7
  Component Side w12: U7.3@1670,2540.51 U7.3@1670,2520 ; R8.1@1680.95,2426.39 1680.95,2477 1670,2487.95 U7.3@1670,2520 ; v1(1693,2520) U7.3@1670,2520 ; U6.H9@2203.74,2053.11 2203.74,2051.56 v1(2222.71,2032.6)
  Signal Layer 2 w15: v1(1693,2520) 1699.49,2520 1774.72,2444.77 1934.52,2444.77 1965.5,2413.78 1965.5,2396.75 2084,2278.25 2084,2223.5 2138.14,2169.36 2157.35,2169.36 2243.43,2083.28 2243.43,2053.31 v1(2222.71,2032.6)
"LIN CS": R9.1 U6.H10 U7.2 | length 905.8
  Component Side w12: U7.2@1620,2540.51 1620,2485.47 1614.53,2480 R9.1@1614.53,2426.61 v1(1651,2426.61) ; v1(2223.43,2075) 2223.43,2072.79 U6.H10@2243.11,2053.11
  Signal Layer 2 w15: v1(1651,2426.61) 1653.74,2426.61 1856.5,2223.85 1856.5,2215.22 1910.22,2161.5 2099,2161.5 2185.5,2075 v1(2223.43,2075)
M0: U2.2 U6.D10 | length 2610
  Component Side w12: v1(1575,1828) 1618,1785 U2.2@1727.87,1785 ; U6.D10@2243.11,2210.59 2262.52,2230 v1(2263,2230)
  Signal Layer 2 w15: v1(1575,1828) 1575,2535 1587.5,2547.5 2010.5,2547.5 2032,2526 2637.5,2526 2651,2512.5 2651,2500.96 2665.82,2486.14 2665.82,2403.82 2528,2266 2429,2266 2390,2227 2344.65,2227 2321.65,2250 2283,2250 v1(2263,2230)
M1: U2.3 U6.C12 | length 1253.7
  Component Side w12: U2.3@1727.87,1835 v1(1755,1835) ; U6.C12@2321.85,2249.96 2357.53,2285.64 v1(2357.53,2285.87)
  Solder Side w12: v1(1755,1835) 1885.8,1835 1894.3,1826.5 1938.55,1826.5 1961.63,1849.57 1961.63,1859.82 1967.16,1865.35 1967.16,2049.59 1930.6,2086.16 1930.6,2131.37 1889.96,2172 1889.96,2255 1962.42,2327.46 2121.62,2327.46 2123.67,2329.5 2232.66,2329.5 2237.66,2324.5 2299.5,2324.5 2338.13,2285.87 v1(2357.53,2285.87)
MISO1: U6.E9
MOSI1: SPI1.5 U6.E10 U11.15 | length 2632.9
  Component Side w12: U6.E10@2243.11,2171.22 2263.39,2191.5 v1(2263.5,2191.5) ; U11.15@2581.04,2317.79 2655.73,2317.79 v1(2655.84,2317.68)
  Signal Layer 2 w15: v1(2263.5,2191.5) 2284.13,2170.87 2471.87,2170.87 2618.68,2317.68 v1(2655.84,2317.68)
  Signal Layer 1 w15: SPI1.5@2340,4185 2339,4184 2339,3793 2385,3747 2488,3747 2510,3725 2510,3333 2665.82,3177.18 2665.82,2364.82 2655.84,2354.84 v1(2655.84,2317.68)
NetBatt1_1: Batt1.1 D7.1 | length 1052.9
  Component Side w12: Batt1.1@1275,2640 1395,2640 1486,2731 1486,3225 1471,3240 v1(1388,3240) ; Batt1.1@1275,3240 v1(1388,3240) ; D7.1@1455,3302.4 1450.27,3302.4 1387.98,3240.11 v1(1388,3240)
NetC5_2: C5.2 C11.2 U11.24 | length 169.1
  Component Side w12: U11.24@2895.84,2012.91 2895.84,1940.37 C5.2@2870,1914.53 C11.2@2930,1914.53
NetC14_2: C14.2 U14.6 Y1.1 | length 234.5
  Component Side w10: 2627.35,1415.87 2640.77,1429.28 2722.03,1429.28 2740.93,1410.37 C14.2@2810.5,1410.37
  Component Side w15: U14.6@2589.37,1415.87 2627.35,1415.87
NetC15_2: C15.2 U14.5 Y1.3 | length 166.9
  Component Side w15: U14.5@2589.37,1390.28 2633.22,1390.28 2660.32,1363.18 2689.34,1363.18 2693.02,1359.5 C15.2@2693.01,1308.96
NetC25_2: C25.2 J3.1 U16.1 | length 471.9
  Component Side w12: v1(1477.53,1441.46) 1477.53,1370.1 J3.1@1491.65,1355.98 ; U16.1@1619.45,1385.55 1617,1385.55 1599.84,1402.71 v1(1599.84,1424) 1600.41,1424.57 1623.09,1424.57 1720,1521.48 C25.2@1720,1564
  Signal Layer 2 w15: v1(1477.53,1441.46) 1484.19,1441.46 1501.65,1424 v1(1599.84,1424)
NetD1_2: D1.2 R2.1 | length 310.5
  Component Side w12: R2.1@1365,1385.47 1365,1324 1419,1270 1419,1166 1400.6,1147.6 D1.2@1400.6,1105
NetD2_2: D2.2 R3.1 | length 370.7
  Component Side w12: R3.1@1430,1385.47 1430,1292 1476.5,1245.5 1506.42,1245.5 1605.6,1146.32 D2.2@1605.6,1105
NetD3_2: D3.2 TVS1.1 | length 667.5
  Component Side w12: TVS1.1@1075,2535 v1(1108.03,2568) ; v1(1565,2855) D3.2@1565,2900
  Signal Layer 2 w15: v1(1108.03,2568) 1278,2568 v1(1565,2855)
NetD4_2: D4.2 R19.1 | length 871.5
  Component Side w12: D4.2@2545.6,1105 v1(2545.6,1150) ; v1(3001,1459) 3001,1545.32 3020.84,1565.16 R19.1@3020.84,1593.47
  Signal Layer 2 w15: v1(2545.6,1150) 2765,1150 2777.5,1162.5 2777.5,1225 2805.5,1253 2904,1253 3001,1350 v1(3001,1459)